# EAGLE board RAUPS (EAGLE 7.2.0)
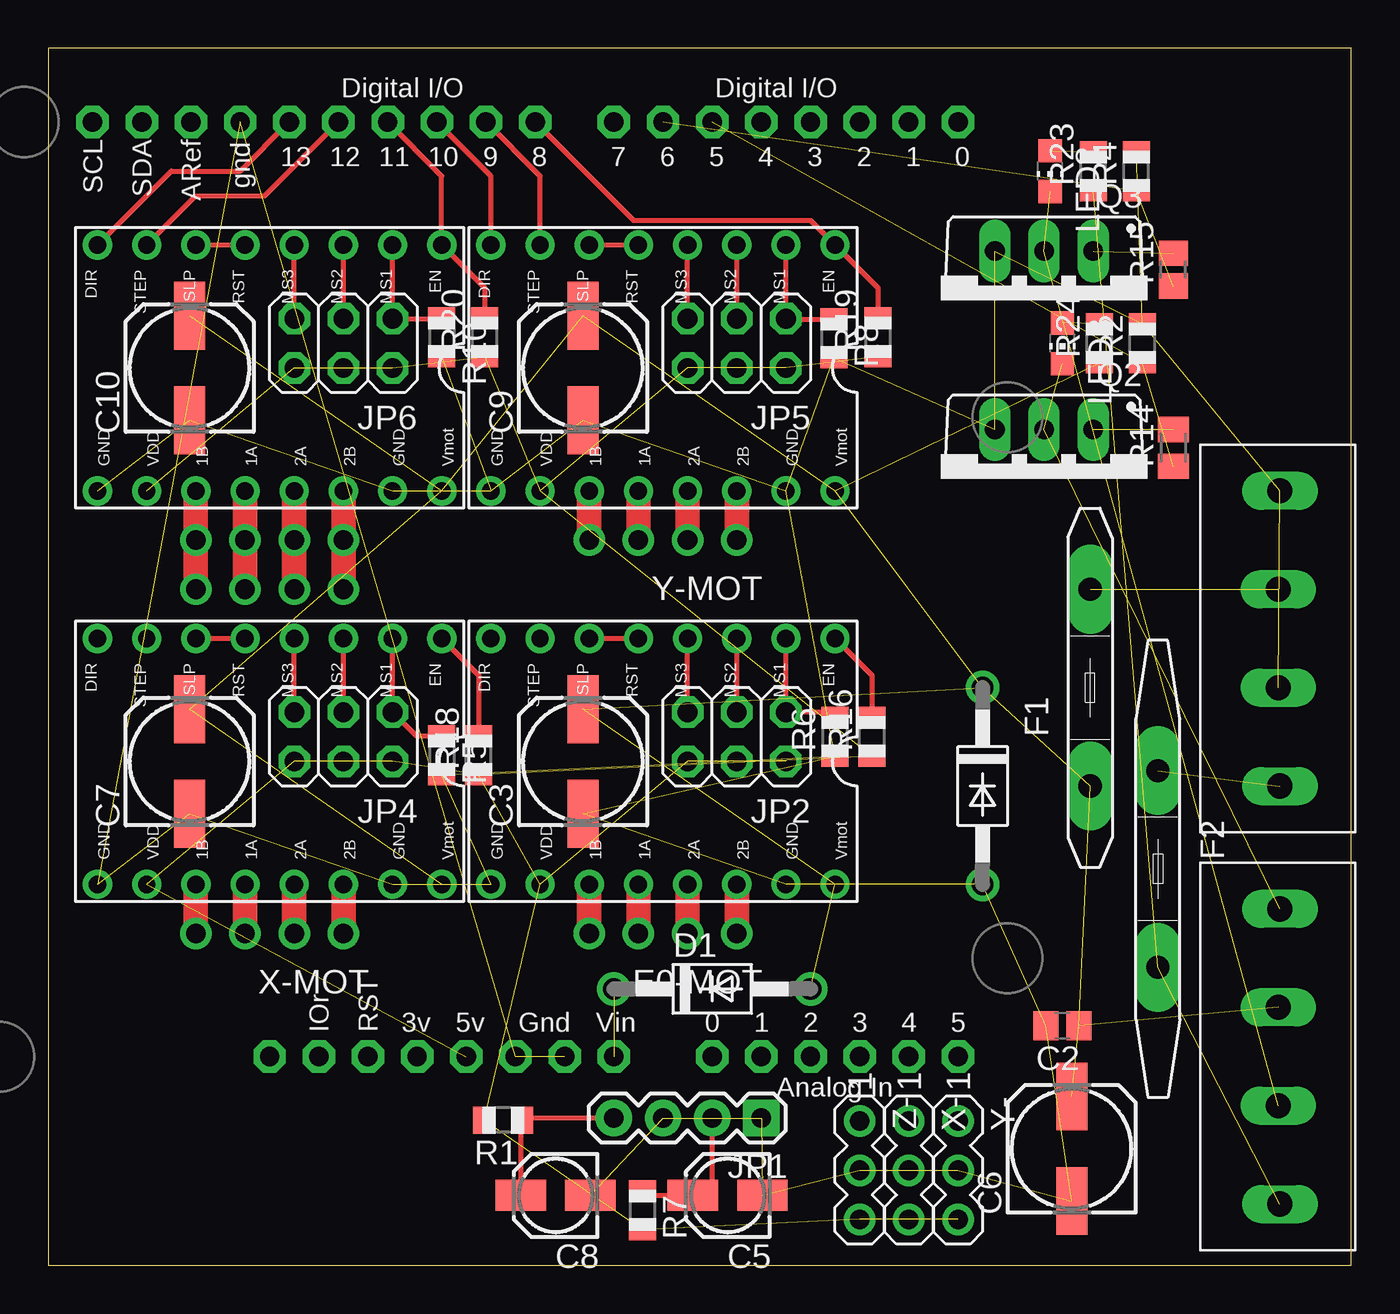
[diagram p0: board, top side]
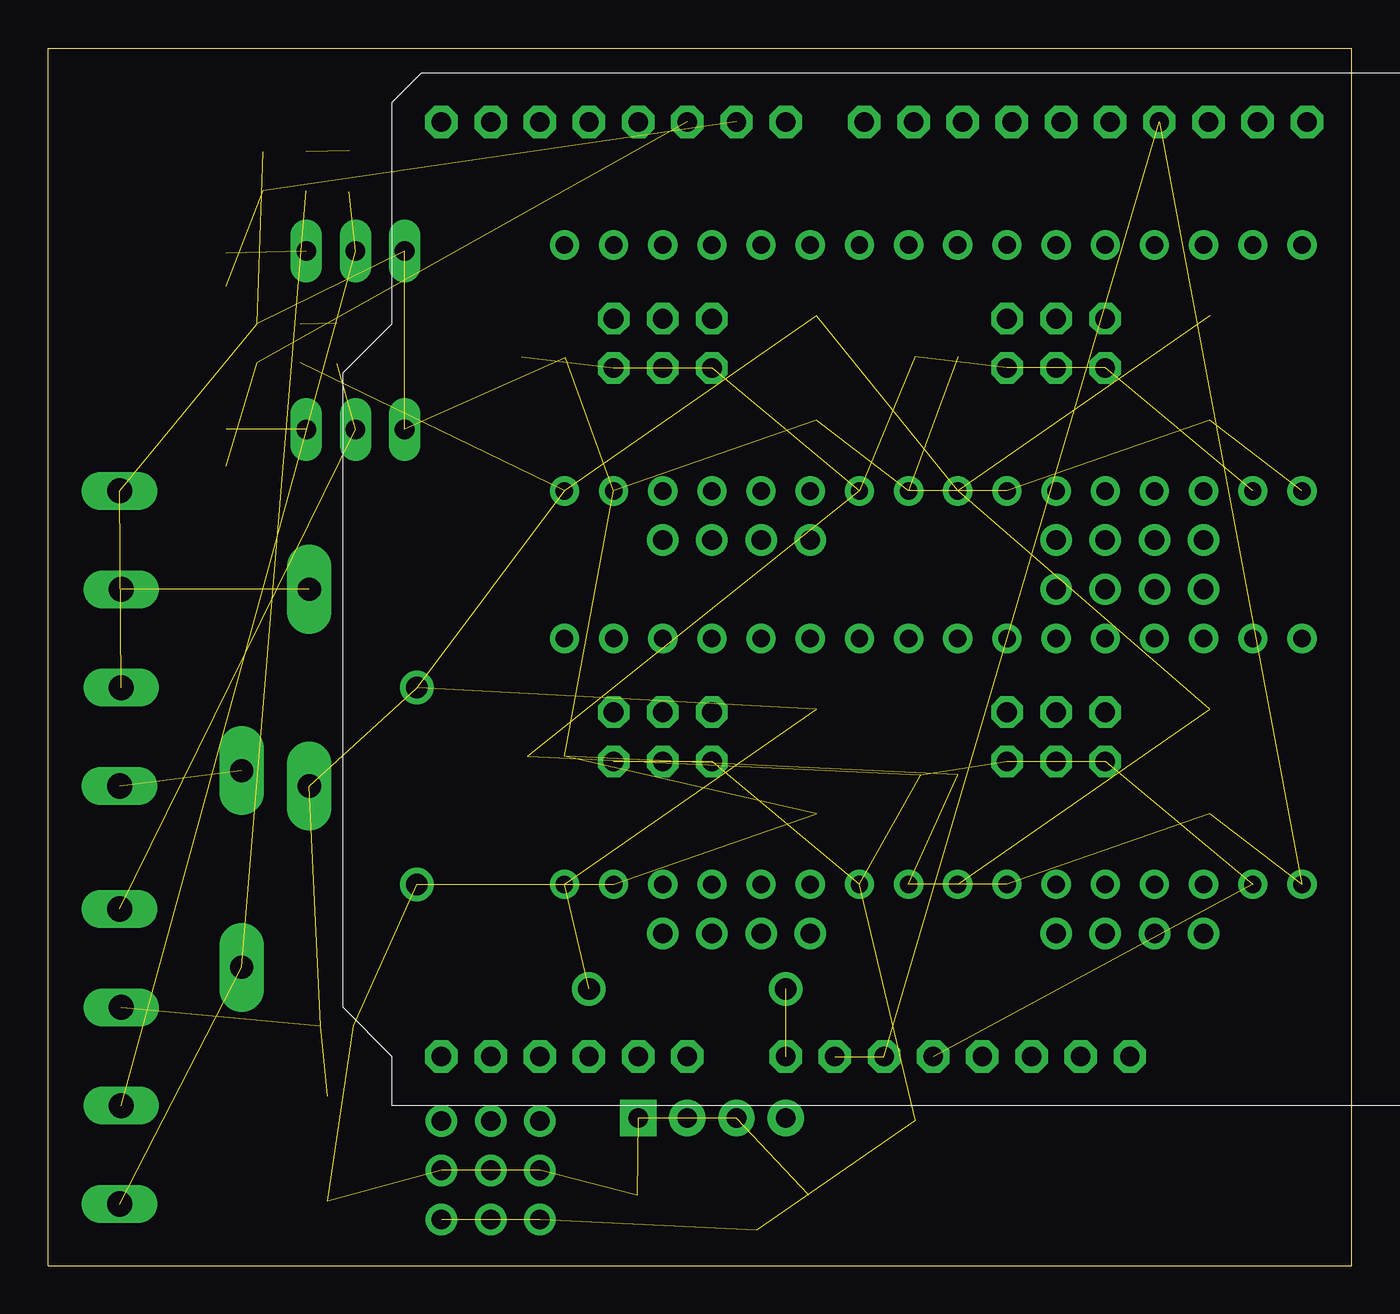
[diagram p1: board, bottom side, seen from below]

Size 67.3 x 62.85 mm. Coordinates in mm from the lower left corner, seen from the top.
Outline: 67.3,0 67.3,62.85 0,62.85 0,0 67.3,0
Copper layers (1*16): Top 0.035mm / dielectric 1.5mm / Bottom 0.035mm
Design rules "GoldPhoenix": minimum track width 7mil, minimum drill 15mil, track to track 7mil, track to pad 7mil, pad to pad 7mil, via to via 7mil, smd to smd 7mil, copper to edge 10mil, drill to drill 8mil, minimum pad ring 12mil, minimum via ring 7mil, stop-mask expansion 4mil, vias tented up to drill 25mil, thermal gap 10mil

## Footprints (pad centres in the part's own frame; a part is rotated, then mirrored left to right if it is on the bottom)
C0805 = smd 1.3 x 1.5: 1 -0.85,0; 2 0.85,0
153CLV-0605 = smd 3.5 x 1.6: + 2.7,0; - -2.7,0
153CLV-0405 = smd 2.6 x 1.6: + 1.8,0; - -1.8,0
DO41-10 = drill 1.118: A 5.08,0; C -5.08,0
A4988BREAKOUT = drill 0.9: 1A 8.89,1.27; 1B 11.43,1.27; 2A 6.35,1.27; 2B 3.81,1.27; DIR 16.51,-11.43; EN -1.27,-11.43; GND 16.51,1.27; GND@0 1.27,1.27; MS1 1.27,-11.43; MS2 3.81,-11.43; MS3 6.35,-11.43; RST 8.89,-11.43; SLP 11.43,-11.43; STEP 13.97,-11.43; VDD 13.97,1.27; VMOT -1.27,1.27
1X04 = drill 1.016: 1 -2.54,0; 2 0,0; 3 2.54,0; 4 5.08,0
MFR500 = drill 1.2 pad 2.3 long: 1 -5.08,0; 2 5.08,0
MFR1100 = drill 1.2 pad 2.3 long: 1 -5.08,0; 2 5.08,0
1X04' = drill 1.016 pad 1.88 square: 1 0,0 | drill 1.016 pad 1.88: 2 2.54,0; 3 5.08,0; 4 7.62,0
2X03 = drill 1.016 octagon: 1 -2.54,-1.27; 2 -2.54,1.27; 3 0,-1.27; 4 0,1.27; 5 2.54,-1.27; 6 2.54,1.27
CHIP-LED0805 = smd 1.2 x 1.2: A 0,-1.05; C 0,1.05
TO220BV = drill 1.016 long: D 0,-2.54; G -2.54,-2.54; S 2.54,-2.54
R0805 = smd 1.1 x 1.4: 1 -1,0; 2 1,0
M0805 = smd 1.3 x 1.6: 1 -0.95,0; 2 0.95,0
R0805' = smd 1.3 x 1.5: 1 -0.85,0; 2 0.85,0
ARDUINOR3-BPLACE = drill 1 pad 1.676 octagon: 3V 35.56,2.54; 5V 38.1,2.54; A0 50.8,2.54; A1 53.34,2.54; A2 55.88,2.54; A3 58.42,2.54; A4 60.96,2.54; A5 63.5,2.54; AREF 23.876,50.8; D0 63.5,50.8; D1 60.96,50.8; D2 58.42,50.8; D3 55.88,50.8; D4 53.34,50.8; D5 50.8,50.8; D6 48.26,50.8; D7 45.72,50.8; D8 41.656,50.8; D9 39.116,50.8; D10 36.576,50.8; D11 34.036,50.8; D12 31.496,50.8; D13 28.956,50.8; GND 26.416,50.8; GND1 43.18,2.54; GND2 40.64,2.54; IOREF 30.48,2.54; RESERVED 27.94,2.54; RESET 33.02,2.54; SCL 18.796,50.8; SDA 21.336,50.8; VIN 45.72,2.54
CONN-4PIN = drill 1.3 long: P1 -7.62,-0.12; P2 -2.54,-0.04; P3 2.54,-0.04; P4 7.62,-0.12
3PIN-HEADER = drill 1.016: 1 -2.54,0; 2 0,0; 3 2.54,0

## Placement (x,y rotation side)
C2  100nF  [C0805]  52.39,12.38 180 top
C3  100uF  [153CLV-0605]  27.62,26.04 90 top
C5  10uF  [153CLV-0405]  35.09,3.62 180 top
C6  100uF  [153CLV-0605]  52.86,6.03 90 top
C7  100uF  [153CLV-0605]  7.3,26.04 90 top
C8  10uF  [153CLV-0405]  26.2,3.62 180 top
C9  100uF  [153CLV-0605]  27.62,46.35 90 top
C10  100uF  [153CLV-0605]  7.3,46.35 90 top
D1  1N4004  [DO41-10]  34.29,14.29 0 top
D2  1N4004  [DO41-10]  48.26,24.77 270 top
E0-DRIVE  A4988BREAKOUT  [A4988BREAKOUT]  39.37,20.95 180 top
E0-MOT  [1X04]  33.02,17.14 180 top
F1  MFR500  [MFR500]  53.82,29.84 90 top
F2  MFR1100  [MFR1100]  57.31,20.48 270 top
JP1  [1X04']  36.83,7.62 180 top
JP2  [2X03]  35.56,27.3 180 top
JP4  [2X03]  15.24,27.3 180 top
JP5  [2X03]  35.56,47.62 180 top
JP6  [2X03]  15.24,47.62 180 top
LED2  [CHIP-LED0805]  51.75,56.52 180 top
LED3  [CHIP-LED0805]  52.39,47.62 180 top
Q2  STP55NF06L  [TO220BV]  51.43,40.64 180 top
Q3  STP55NF06L  [TO220BV]  51.43,49.85 180 top
R1  4.7K  [R0805]  23.5,7.51 180 top
R2  100k  [R0805]  56.52,47.62 90 top
R4  100k  [R0805]  56.2,56.52 90 top
R5  100k  [R0805]  20.32,26.35 270 top
R6  100k  [R0805]  40.64,27.3 90 top
R7  4.7K  [R0805]  30.68,2.86 270 top
R8  100k  [R0805]  40.58,47.88 270 top
R10  100k  [R0805]  20.32,47.94 270 top
R14  10r  [M0805]  58.1,42.23 90 top
R15  10r  [R0805']  58.1,51.44 90 top
R16  10k  [R0805]  42.54,27.3 90 top
R18  10k  [R0805]  22.23,26.35 90 top
R19  10k  [R0805]  42.86,47.94 90 top
R20  10k  [R0805]  22.54,47.94 90 top
R23  1.8K  [R0805]  53.97,56.52 90 top
R24  1.8K  [R0805]  54.29,47.62 90 top
U1  ARDUINOR3-BPLACE  [ARDUINOR3-BPLACE]  -16.51,8.25 0 top
U$1  4PIN_SOCKET  [CONN-4PIN]  63.5,32.38 90 top
U$2  4PIN_SOCKET  [CONN-4PIN]  63.5,10.79 90 top
X-  [3PIN-HEADER]  44.45,4.92 270 top
X-DRIVE  A4988BREAKOUT  [A4988BREAKOUT]  19.05,20.95 180 top
X-MOT  [1X04]  12.7,17.15 180 top
Y-  [3PIN-HEADER]  46.99,4.92 270 top
Y-DRIVE  A4988BREAKOUT  [A4988BREAKOUT]  39.37,41.27 180 top
Y-MOT  [1X04]  33.02,37.47 180 top
Z-  [3PIN-HEADER]  41.91,4.92 270 top
Z-DRIVE  A4988BREAKOUT  [A4988BREAKOUT]  19.05,41.27 180 top
Z-MOT  [1X04]  12.7,34.92 180 top
Z-MOT1  [1X04]  12.7,37.46 180 top

## Library data of the parts
C2 R14 R15 = resistor
C3 C5-C10 R1 R2 R4-R8 R10 R16 R18-R20 R23 R24 U1 = adafruit
D1 D2 = diode
E0-DRIVE E0-MOT F1 F2 X-DRIVE X-MOT Y-DRIVE Y-MOT Z-DRIVE Z-MOT Z-MOT1 = RepRapjr
JP1 = SparkFun-Connectors
JP2 JP4-JP6 = pinhead
LED2 LED3 = led
Q2 Q3 = transistor-power
U$1 U$2 = ControllerCard
X- Y- Z- = ultimachine

## Nets
3V: U1.3V
+12V: C2.1 C3.+ C6.+ C7.+ C9.+ C10.+ D1.A D2.C E0-DRIVE.VMOT F1.1 R24.1 U$2.P3 X-DRIVE.VMOT Y-DRIVE.VMOT Z-DRIVE.VMOT
+12V2: F2.2 R23.1 U$2.P1
D8: R4.1 R15.1 U1.D6
D9: R2.1 R14.1 U1.D5
E0-DIR: E0-DRIVE.DIR
E0-EN: E0-DRIVE.EN R16.2
E0-STEP: E0-DRIVE.STEP
GND: C2.2 C3.- C5.- C6.- C7.- C8.- C9.- C10.- D2.A E0-DRIVE.GND E0-DRIVE.GND@0 JP1.1 JP1.3 Q2.S Q3.S R2.2 R4.2 R5.2 R6.1 R8.2 R10.2 U1.GND U1.GND1 U1.GND2 U$1.P2 U$1.P4 X-.2 X-DRIVE.GND X-DRIVE.GND@0 Y-.2 Y-DRIVE.GND Y-DRIVE.GND@0 Z-.2 Z-DRIVE.GND Z-DRIVE.GND@0
N$1: LED3.C Q2.D U$2.P4
N$3: E0-DRIVE.2B E0-MOT.1
N$4: E0-DRIVE.2A E0-MOT.2
N$5: E0-DRIVE.MS1 JP2.1 R6.2
N$6: E0-DRIVE.MS3 JP2.5
N$8: E0-DRIVE.RST E0-DRIVE.SLP
N$9: E0-DRIVE.MS2 JP2.3
N$10: E0-DRIVE.1A E0-MOT.3
N$11: E0-DRIVE.1B E0-MOT.4
N$14: JP4.1 R5.1 X-DRIVE.MS1
N$15: JP4.3 X-DRIVE.MS2
N$17: JP5.3 Y-DRIVE.MS2
N$19: JP4.5 X-DRIVE.MS3
N$20: X-DRIVE.RST X-DRIVE.SLP
N$21: X-DRIVE.2B X-MOT.1
N$22: X-DRIVE.2A X-MOT.2
N$23: Y-DRIVE.RST Y-DRIVE.SLP
N$26: X-DRIVE.1A X-MOT.3
N$27: X-DRIVE.1B X-MOT.4
N$28: Y-DRIVE.2B Y-MOT.1
N$29: Y-DRIVE.2A Y-MOT.2
N$30: Y-DRIVE.1A Y-MOT.3
N$31: JP5.5 Y-DRIVE.MS3
N$32: LED2.A R23.2
N$33: JP5.1 R8.1 Y-DRIVE.MS1
N$36: Y-DRIVE.1B Y-MOT.4
N$37: JP6.3 Z-DRIVE.MS2
N$38: Z-DRIVE.RST Z-DRIVE.SLP
N$39: JP6.5 Z-DRIVE.MS3
N$40: JP6.1 R10.1 Z-DRIVE.MS1
N$41: Z-DRIVE.2B Z-MOT1.1 Z-MOT.1
N$42: Z-DRIVE.2A Z-MOT1.2 Z-MOT.2
N$43: Z-DRIVE.1A Z-MOT1.3 Z-MOT.3
N$44: Z-DRIVE.1B Z-MOT1.4 Z-MOT.4
N$45: LED3.A R24.2
N$47: Q2.G R14.2
N$49: Q3.G R15.2
N$51: LED2.C Q3.D U$2.P2
N$53: F2.1 U$1.P1
N$54: F1.2 U$1.P3
THERM0: C5.+ JP1.2 R7.1
THERM1: C8.+ JP1.4 R1.1
VCC: E0-DRIVE.VDD JP2.2 JP2.4 JP2.6 JP4.2 JP4.4 JP4.6 JP5.2 JP5.4 JP5.6 JP6.2 JP6.4 JP6.6 R1.2 R7.2 R16.1 R18.1 R19.1 R20.1 U1.5V X-.3 X-DRIVE.VDD Y-.3 Y-DRIVE.VDD Z-.3 Z-DRIVE.VDD
VIN: D1.C U1.VIN
X-DIR: X-DRIVE.DIR
X-EN: R18.2 X-DRIVE.EN
X-MIN: X-.1
X-STEP: X-DRIVE.STEP
Y-DIR: U1.D10 Y-DRIVE.DIR
Y-EN: R19.2 U1.D8 Y-DRIVE.EN
Y-MIN: Y-.1
Y-STEP: U1.D9 Y-DRIVE.STEP
Z-DIR: U1.D13 Z-DRIVE.DIR
Z-EN: R20.2 U1.D11 Z-DRIVE.EN
Z-MIN: Z-.1
Z-STEP: U1.D12 Z-DRIVE.STEP

## Tracks (layer width: path | path; a pad name or v marks a point on that pad's centre or on a via)
+12V  (14 unrouted)
+12V2  (2 unrouted)
D8  (2 unrouted)
D9  (2 unrouted)
E0-EN
  Top 0.254: E0-DRIVE.EN 42.54,30.48 R16.2
GND  (34 unrouted)
N$1  (2 unrouted)
N$3
  Top 1.27: E0-DRIVE.2B E0-MOT.1 | E0-MOT.1
N$4
  Top 1.27: E0-DRIVE.2A E0-MOT.2 | E0-MOT.2
N$5
  Top 0.254: E0-DRIVE.MS1 JP2.1 40.37,28.58 R6.2
N$6
  Top 0.254: JP2.5 E0-DRIVE.MS3
N$8
  Top 0.254: E0-DRIVE.SLP E0-DRIVE.RST
N$9
  Top 0.254: JP2.3 E0-DRIVE.MS2
N$10
  Top 1.27: E0-DRIVE.1A E0-MOT.3 | E0-MOT.3
N$11
  Top 1.27: E0-DRIVE.1B E0-MOT.4 | E0-MOT.4
N$14
  Top 0.254: X-DRIVE.MS1 JP4.1 19,27.35 R5.1 | X-DRIVE.MS1
N$15
  Top 0.254: JP4.3 X-DRIVE.MS2 | X-DRIVE.MS2
N$17
  Top 0.254: JP5.3 Y-DRIVE.MS2
N$19
  Top 0.254: JP4.5 X-DRIVE.MS3 | X-DRIVE.MS3
N$20
  Top 0.254: X-DRIVE.SLP X-DRIVE.RST
N$21
  Top 1.27: X-DRIVE.2B 15.24,18.41 | 15.24,18.41 | 15.24,18.41 X-MOT.1
N$22
  Top 1.27: X-DRIVE.2A X-MOT.2 | X-MOT.2
N$23
  Top 0.254: Y-DRIVE.SLP Y-DRIVE.RST
N$26
  Top 1.27: X-DRIVE.1A X-MOT.3 | X-MOT.3
N$27
  Top 1.27: X-DRIVE.1B X-MOT.4 | X-MOT.4
N$28
  Top 1.27: Y-DRIVE.2B Y-MOT.1
N$29
  Top 1.27: Y-DRIVE.2A Y-MOT.2
N$30
  Top 1.27: Y-DRIVE.1A Y-MOT.3
N$31
  Top 0.254: JP5.5 Y-DRIVE.MS3
N$32  (1 unrouted)
N$33
  Top 0.254: Y-DRIVE.MS1 JP5.1 38.12,48.88 R8.1
N$36
  Top 1.27: Y-DRIVE.1B Y-MOT.4
N$37
  Top 0.254: JP6.3 Z-DRIVE.MS2
N$38
  Top 0.254: Z-DRIVE.SLP Z-DRIVE.RST
N$39
  Top 0.254: JP6.5 Z-DRIVE.MS3
N$40
  Top 0.254: Z-DRIVE.MS1 JP6.1 20.27,48.9 R10.1
N$41
  Top 1.27: Z-DRIVE.2B Z-MOT1.1 Z-MOT.1
N$42
  Top 1.27: Z-DRIVE.2A Z-MOT1.2 Z-MOT.2
N$43
  Top 1.27: Z-DRIVE.1A Z-MOT1.3 Z-MOT.3
N$44
  Top 1.27: Z-DRIVE.1B Z-MOT1.4 Z-MOT.4
N$45  (1 unrouted)
N$47  (1 unrouted)
N$49  (1 unrouted)
N$51  (2 unrouted)
N$53  (1 unrouted)
N$54  (1 unrouted)
THERM0
  Top 0.254: JP1.2 34.29,3.62 C5.+ 30.68,3.62 R7.1
THERM1
  Top 0.254: JP1.4 24.5,7.62 R1.1 24.4,7.51 C8.+
VCC  (25 unrouted)
VIN  (1 unrouted)
X-EN
  Top 0.254: X-DRIVE.EN 22.23,30.48 R18.2
Y-DIR
  Top 0.254: Y-DRIVE.DIR 22.86,56.26 U1.D10
Y-EN
  Top 0.254: R19.2 42.86,50.48 Y-DRIVE.EN 39.37,53.98 30.23,53.98 U1.D8
Y-STEP
  Top 0.254: Y-DRIVE.STEP 25.4,56.26 U1.D9
Z-DIR
  Top 0.254: Z-DRIVE.DIR 6.35,56.52 9.91,56.52 U1.D13
Z-EN
  Top 0.254: U1.D11 20.32,56.26 Z-DRIVE.EN 22.54,50.48 R20.2
Z-STEP
  Top 0.254: Z-DRIVE.STEP 7.62,55.24 11.18,55.24 U1.D12

## Text on the board
_tsilk: END STOPS